# Altium PCB Top.PcbDoc
Units mm, origin at the board's own origin, x right, y up, seen from the top; angles counter-clockwise.
Board outline 184.78 x 90.88 mm, 2 copper layers (Top Layer, Bottom Layer); 66 components, 68 nets, 278 pads, 149 vias.
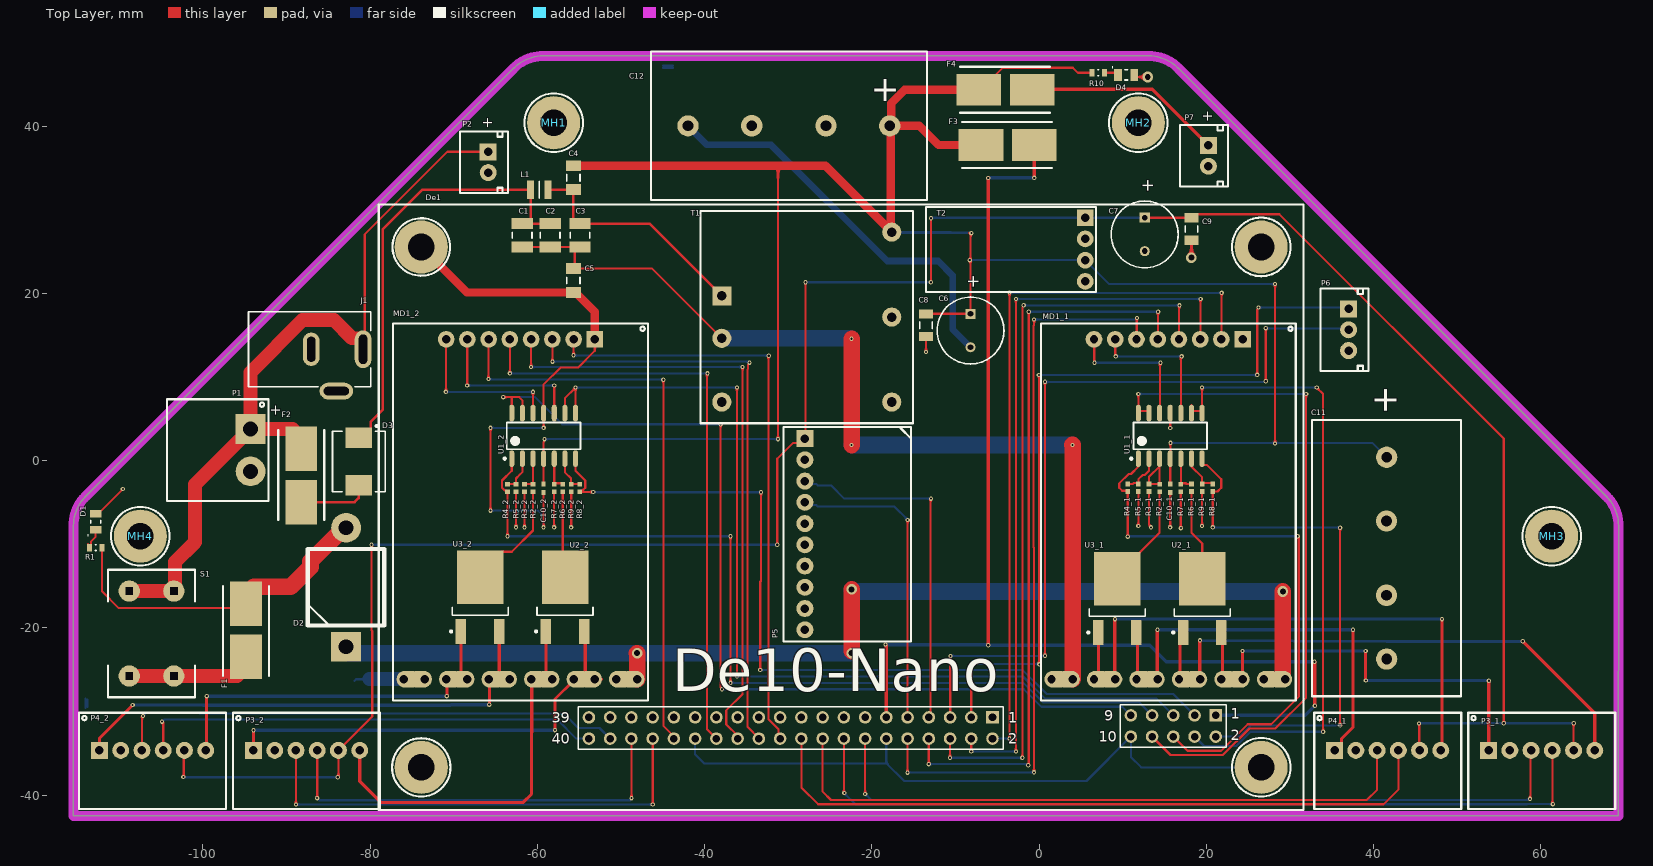
[diagram p0: Top Layer view]
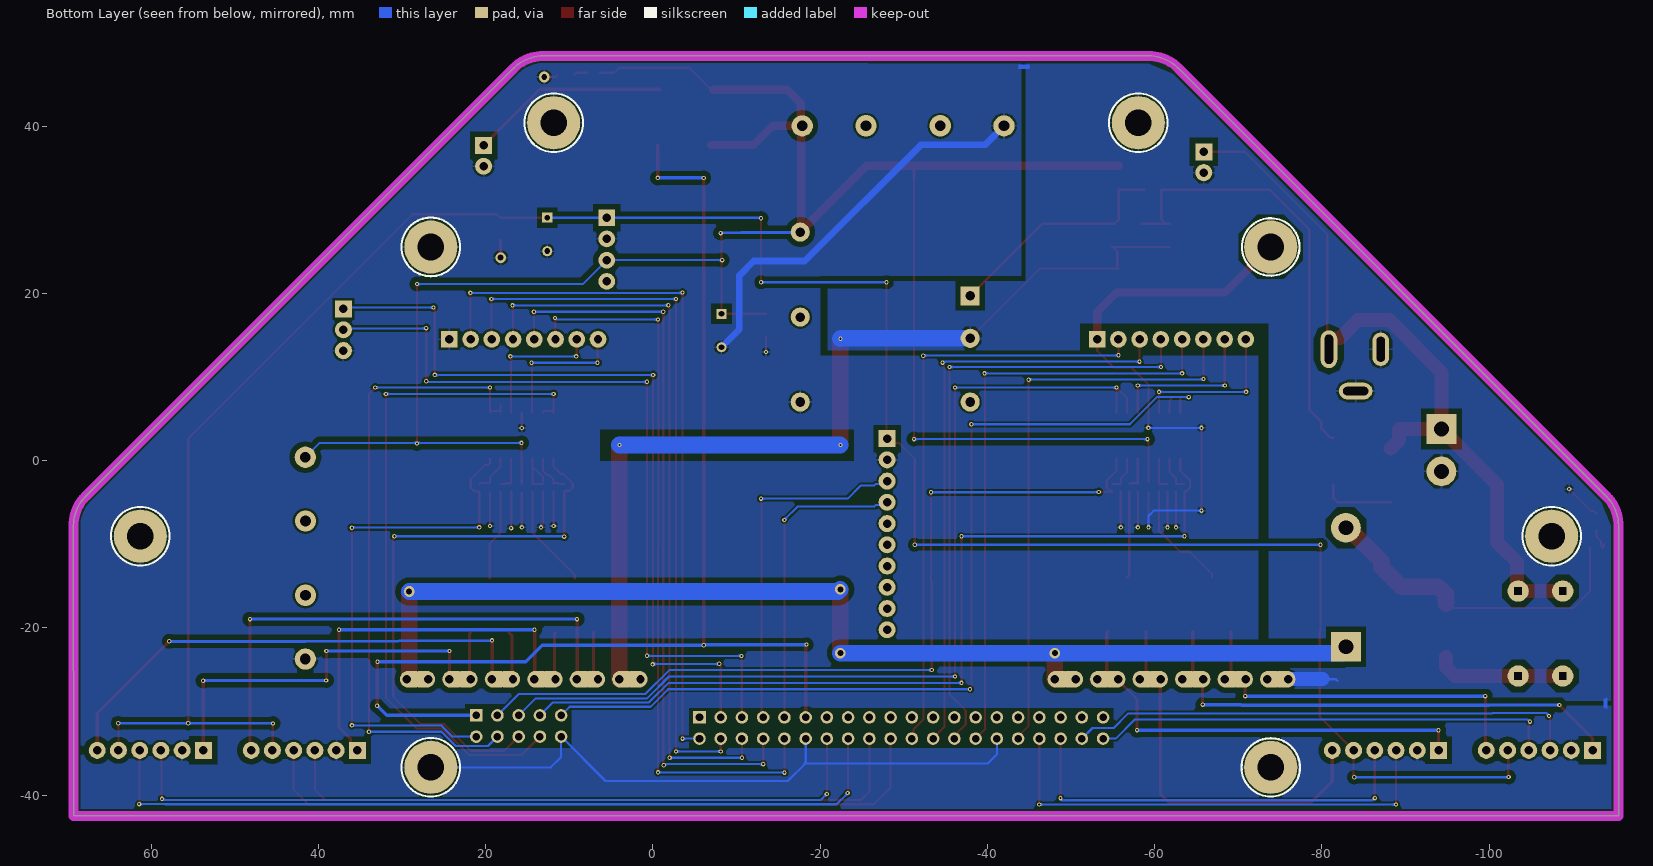
[diagram p1: Bottom Layer view, seen from below]

## Layer stack, top to bottom
Top Solder: solder mask 0.0102, Solder Resist, Dk 3.5
Top Layer: signal copper 0.0356
Dielectric 1: dielectric 0.32, FR-4, Dk 4.8
Bottom Layer: signal copper 0.0356
Bottom Solder: solder mask 0.0102, Solder Resist, Dk 3.5

## Board outline
-115.487,-42.48 -115.487,-7.789 cw(c-110.487,-7.789) -114.023,-4.253 -62.832,46.937 cw(c-59.297,43.402) -59.297,48.402 13.098,48.402 cw(c13.098,43.402) 16.633,46.937 67.824,-4.253 cw(c64.288,-7.789) 69.288,-7.789 69.287,-7.789 69.255,-42.48

## Design rules (kind name [scope] priority, off if disabled: settings)
Clearance "Schematic Clearance Constraint_5" [InNet('NetD3_1')] p1: gap=0.65 ignorepadtopadclearanceinfootprint=TRUE except(0: Arc-Hole Track-Hole SMDPad-Hole THPad-Hole Via-Hole Fill-Hole Poly-Hole Region-Hole Text-Hole)
Clearance "Schematic Clearance Constraint_2" [InNet('NetT1_6')] p2: gap=0.65 ignorepadtopadclearanceinfootprint=TRUE except(0: Arc-Hole Track-Hole SMDPad-Hole THPad-Hole Via-Hole Fill-Hole Poly-Hole Region-Hole Text-Hole)
Clearance "Schematic Clearance Constraint_4" [InNet('NetC3_1')] p3: gap=0.65 ignorepadtopadclearanceinfootprint=TRUE except(0: Arc-Hole Track-Hole SMDPad-Hole THPad-Hole Via-Hole Fill-Hole Poly-Hole Region-Hole Text-Hole)
Clearance "Schematic Clearance Constraint_7" [InNetClass('motor_out')] p4: gap=0.65 ignorepadtopadclearanceinfootprint=TRUE except(0: Arc-Hole Track-Hole SMDPad-Hole THPad-Hole Via-Hole Fill-Hole Poly-Hole Region-Hole Text-Hole)
Clearance "Schematic Clearance Constraint_3" [InNetClass('De10_power')] p5: gap=0.61 ignorepadtopadclearanceinfootprint=TRUE except(0: Arc-Hole Track-Hole SMDPad-Hole THPad-Hole Via-Hole Fill-Hole Poly-Hole Region-Hole Text-Hole)
Clearance "Schematic Clearance Constraint_18" [InNetClass('battery_power')] p6: gap=0.65 ignorepadtopadclearanceinfootprint=TRUE except(0: Arc-Hole Track-Hole SMDPad-Hole THPad-Hole Via-Hole Fill-Hole Poly-Hole Region-Hole Text-Hole)
Clearance "Schematic Clearance Constraint_13" [InNet('NetC1_1')] p7: gap=0.65 ignorepadtopadclearanceinfootprint=TRUE except(0: Arc-Hole Track-Hole SMDPad-Hole THPad-Hole Via-Hole Fill-Hole Poly-Hole Region-Hole Text-Hole)
Clearance "Schematic Clearance Constraint_1" [InNetClass('digital_5v')] p8: gap=0.61 ignorepadtopadclearanceinfootprint=TRUE except(0: Arc-Hole Track-Hole SMDPad-Hole THPad-Hole Via-Hole Fill-Hole Poly-Hole Region-Hole Text-Hole)
Clearance "Schematic Clearance Constraint" [InNet('3P3')] p9: gap=0.6 ignorepadtopadclearanceinfootprint=TRUE except(0: Arc-Hole Track-Hole SMDPad-Hole THPad-Hole Via-Hole Fill-Hole Poly-Hole Region-Hole Text-Hole)
Clearance [All] p10: gap=0.254 ignorepadtopadclearanceinfootprint=TRUE except(0: Arc-Hole Track-Hole SMDPad-Hole THPad-Hole Via-Hole Fill-Hole Poly-Hole Region-Hole Text-Hole)
ComponentClearance [All] p1 off: gap=0.254 collisioncheckmode=3 verticalgap=0.254 showdistances=FALSE
HoleSize [All] p1: absolutevalues=TRUE maxlimit=7.62 minlimit=0.025 maxpercent=80.000 minpercent=20.000
MinimumSolderMaskSliver [All] p1: minsoldermaskwidth=0.127
PolygonConnect [All] p1: connectstyle=Relief reliefconductorwidth=0.254 reliefentries=4 polygonreliefangle="90 Angle" airgapwidth=0.254
RoutingVias "Schematic Routing Via Style_5" [InNetClass('motor_out')] p1: holewidth=0.254 width=0.508 viastyle="Through Hole" minholewidth=0.254 minwidth=0.508 maxholewidth=0.381 maxwidth=0.762
RoutingVias "Schematic Routing Via Style_4" [InNetClass('De10_power')] p2: holewidth=0.254 width=0.508 viastyle="Through Hole" minholewidth=0.254 minwidth=0.508 maxholewidth=0.711 maxwidth=1.27
RoutingVias "Schematic Routing Via Style_3" [InNetClass('digital_5v')] p3: holewidth=0.711 width=1.27 viastyle="Through Hole" minholewidth=0.254 minwidth=0.508 maxholewidth=0.711 maxwidth=1.27
RoutingVias "Schematic Routing Via Style_2" [InNetClass('digital_power_in')] p4: holewidth=0.254 width=0.508 viastyle="Through Hole" minholewidth=0.254 minwidth=0.508 maxholewidth=0.381 maxwidth=0.762
RoutingVias "Schematic Routing Via Style_1" [InNetClass('digital_3P3v')] p5: holewidth=0.254 width=0.508 viastyle="Through Hole" minholewidth=0.254 minwidth=0.508 maxholewidth=0.711 maxwidth=1.27
RoutingVias "Schematic Routing Via Style" [InNetClass('battery_power')] p6: holewidth=0.9 width=1.67 viastyle="Through Hole" minholewidth=0.711 minwidth=1.27 maxholewidth=1.5 maxwidth=2.09
RoutingVias [All] p7: holewidth=0.381 width=0.635 viastyle="Through Hole" minholewidth=0.254 minwidth=0.508 maxholewidth=0.635 maxwidth=1.27
SilkToSilkClearance [All] p1: silktosilkclearance=0.051
SilkToSolderMaskClearance [IsPad] p1: minsilkscreentomaskgap=0.127 clearancetoexposedcopper=TRUE
SolderMaskExpansion [All] p1: expansion=0.102 istentingtop=FALSE
Width "Schematic Width Constraint_8" [InNetClass('motor_out')] p1: maxlimit=0.381 minlimit=0.254 preferedwidth=0.381
Width "Schematic Width Constraint_25" [InNetClass('De10_power')] p2: maxlimit=0.45 minlimit=0.41 preferedwidth=0.41
Width "Schematic Width Constraint_24" [InNetClass('battery_power')] p3: maxlimit=2 minlimit=0.254 preferedwidth=1.67
Width "Schematic Width Constraint_6" [InNet('3P3')] p4: maxlimit=0.381 minlimit=0.254 preferedwidth=0.254
Width "Schematic Width Constraint_5" [InNetClass('digital_power_in')] p5: maxlimit=0.31 minlimit=0.254 preferedwidth=0.29
Width "Schematic Width Constraint" [InNetClass('digital_5v')] p6: maxlimit=1 minlimit=0.254 preferedwidth=0.8
Width [All] p7: maxlimit=0.254 minlimit=0.254 preferedwidth=0.254
25 further rules are at their usual default settings.

## Classes and differential pairs
net class digital_power_in: NetC1_1 NetC3_1 NetD3_1 NetT1_6
net class De10_power: De10-Power NetF4_2
net class motor_out: MA1_1 MA1_2 MA2_1 MA2_2 MB1_1 MB1_2 MB2_1 MB2_2 NetT1_6
net class digital_5v: 5V NetT1_4
net class digital_3P3v: 3P3
net class battery_power: A_12V B_12V NetD1_1 NetD2_1 NetF1_1
net class MB_V[1..2]: MB_V1 MB_V2
net class MB_PWM[1..2]: MB_PWM1 MB_PWM2
net class MB_phaseB[1..2]: MB_phaseB1 MB_phaseB2
net class MB_phaseA[1..2]: MB_phaseA1 MB_phaseA2
net class MB_DIR[1..2]: MB_DIR1 MB_DIR2
net class MA_V[1..2]: MA_V1 MA_V2
net class MA_PWM[1..2]: MA_PWM1 MA_PWM2
net class MA_phaseB[1..2]: MA_phaseB1 MA_phaseB2
net class MA_phaseA[1..2]: MA_phaseA1 MA_phaseA2
net class MA_DIR[1..2]: MA_DIR1 MA_DIR2
net class Drive_EN[1..2]: Drive_EN1 Drive_EN2
net class CSB_FeedBack[1..2]: CSB_FeedBack1 CSB_FeedBack2
net class CSA_FeedBack[1..2]: CSA_FeedBack1 CSA_FeedBack2
component class Power: C1 C2 C3 C4 C5 C6 C7 C8 C9 D1 D2 D3 F1 F2 J1 L1 LED1 P1 P2 R1 S1 T1 T2
component class Communication: C11 C12 D4 De1 F3 F4 P5 P6 P7 R10
channel class MotorCtrl: MotorCtrl1 MotorCtrl2
component class Top: MH1 MH2 MH3 MH4
component class MotorCtrl2: C10_2 MD1_2 P3_2 P4_2 R2_2 R3_2 R4_2 R5_2 R6_2 R7_2 R8_2 R9_2 U1_2 U2_2 U3_2
component class MotorCtrl1: C10_1 MD1_1 P3_1 P4_1 R2_1 R3_1 R4_1 R5_1 R6_1 R7_1 R8_1 R9_1 U1_1 U2_1 U3_1

## Components (designator, comment, footprint, x,y, rotation, side; value= is the part's Value field where it differs from the comment)
C1 "25V 3.3uF" "1210 SMD" -61.824,26.947 r270 top value=3.3uF
C2 "25V 3.3uF" "1210 SMD" -58.471,26.947 r270 top value=3.3uF
C3 "25V 3.3uF" "1210 SMD" -54.915,26.947 r270 top value=3.3uF
C4 "2kV 1800pF" "1206 SMD" -55.71,33.836 r90 top value=1800pF
C5 "2kV 1800pF" "1206 SMD" -55.71,21.537 r270 top value=1800pF
C6 "25V 220uF" RB4-8 -8.204,13.559 r90 top value=1000uF
C7 "25V 220uF" RB4-8 12.624,25.053 r90 top value=1000uF
C8 "50V 0.1uF" C1206 -13.538,16.179 r90 top value=1uF
C9 "50V 0.1uF" C1206 18.212,27.703 r90 top value=1uF
C10_1 "0402 SMD MLCC" 0402 15.672,-3.313 r270 top value=0.1uF (schematic designator C10)
C10_2 "0402 SMD MLCC" 0402 -59.258,-3.313 r270 top value=0.1uF (schematic designator C10)
C11 "5.5v 10f" "5.5V 10F SUPPY CAP" 49.794,-11.658 r270 top
C12 "5.5v 10f" "5.5V 10F SUPPY CAP" -29.929,31.791 r180 top
D1 "0805 LED(G)" "0805 SMD DIODE" -112.825,-7.3 r90 top
D2 "10SQ045" 10SQ045 -87.452,-19.715 r90 top
D3 "SK54" SK54 -81.356,-0.101 r270 top
D4 "0805 LED(G)" "0805 SMD DIODE" 10.404,46.127 r0 top
De1 "De10-Nano" DE10-NANO -53.839,-35.787 r0 top locked
F1 "Fuse Holder" "SMD FUSES HOLDER" -94.844,-20.167 r90 top value="220V 10A"
F2 "Fuse Holder" "SMD FUSES HOLDER" -88.24,-1.879 r270 top value="220V 5A"
F3 "Fuse Holder" "SMD FUSES HOLDER" -3.658,37.745 r0 top value="220V 2.5A"
F4 "Fuse Holder" "SMD FUSES HOLDER" -3.912,44.349 r0 top value="220V 2.5A"
J1 "PWR2.5" PWD2.5 -88.953,12.417 r0 top
L1 "1uH" DFE2HCAH1R0MJ0L -59.783,32.411 r0 top value=2.2uH
MD1_1 "MD02" MOTOR_DRIVER 24.335,14.503 r270 top locked (schematic designator MD1)
MD1_2 "MD02" MOTOR_DRIVER -53.135,14.503 r270 top locked (schematic designator MD1)
MH1 "M3 Hole" "M3 HOLE" -58.054,40.402 r0 top locked
MH2 "M3 Hole" "M3 HOLE" 11.855,40.402 r0 top locked
MH3 "M3 Hole" "M3 HOLE" 61.288,-9.031 r0 top locked
MH4 "M3 Hole" "M3 HOLE" -107.487,-9.031 r0 top locked
P1 "battery_pin" "KF2EDGR-5.08 2P" -94.31,3.797 r270 top
P2 "battery_display" B2B-XH-A -63.526,39.37 r270 top
P3_1 "MA_Pin" S6B-XH-A 51.307,-30.149 r0 top locked (schematic designator P3)
P3_2 "MA_Pin" S6B-XH-A -96.394,-30.149 r0 top (schematic designator P3)
P4_1 "MB_Pin" S6B-XH-A 32.892,-30.149 r0 top (schematic designator P4)
P4_2 "MB_Pin" S6B-XH-A -114.809,-30.149 r0 top (schematic designator P4)
P5 "MPU9250" MPU9250 -28.016,2.637 r0 top
P6 "UART_Pin" B3B-XH-A 39.362,10.719 r270 top
P7 "RPi Power" B2B-XH-A 22.598,40.132 r270 top
R1 "0603" "0603 SMD RES" -112.825,-10.389 r0 top value=150K
R2_1 "12k" "0402 SMD RES" 14.402,-3.263 r90 top (schematic designator R2)
R2_2 "12k" "0402 SMD RES" -60.528,-3.263 r90 top (schematic designator R2)
R3_1 "3.3k" "0402 SMD RES" 13.132,-3.246 r270 top (schematic designator R3)
R3_2 "3.3k" "0402 SMD RES" -61.544,-3.263 r270 top (schematic designator R3)
R4_1 "3.3k" "0402 SMD RES" 10.592,-3.246 r270 top (schematic designator R4)
R4_2 "3.3k" "0402 SMD RES" -63.576,-3.263 r270 top (schematic designator R4)
R5_1 "12k" "0402 SMD RES" 11.862,-3.246 r90 top (schematic designator R5)
R5_2 "12k" "0402 SMD RES" -62.56,-3.263 r90 top (schematic designator R5)
R6_1 "12k" "0402 SMD RES" 18.212,-3.246 r90 top (schematic designator R6)
R6_2 "12k" "0402 SMD RES" -56.972,-3.263 r90 top (schematic designator R6)
R7_1 "3.3k" "0402 SMD RES" 16.942,-3.263 r270 top (schematic designator R7)
R7_2 "3.3k" "0402 SMD RES" -57.988,-3.263 r270 top (schematic designator R7)
R8_1 "3.3k" "0402 SMD RES" 20.752,-3.246 r270 top (schematic designator R8)
R8_2 "3.3k" "0402 SMD RES" -54.94,-3.263 r270 top (schematic designator R8)
R9_1 "12k" "0402 SMD RES" 19.482,-3.246 r90 top (schematic designator R9)
R9_2 "12k" "0402 SMD RES" -55.956,-3.263 r90 top (schematic designator R9)
R10 "0603" "0603 SMD RES" 7.073,46.381 r180 top value=150K
S1 "EMS" 4.8插片 -108.814,-15.595 r270 top
T1 "JSM2512S05" JSM2524S05 -15.088,29.871 r270 top
T2 "Small Power Supply" "SAMLL POWER SUPPLY" 6.782,30.323 r270 top
U1_1 "OPA4277UA" OPA4277UA 15.672,2.96 r90 top (schematic designator U1)
U1_2 "OPA4277UA" OPA4277UA -59.258,2.96 r90 top (schematic designator U1)
U2_1 "MBRD1035CTL" MBRD1035CTL 19.505,-16.449 r90 top (schematic designator U2)
U2_2 "MBRD1035CTL" MBRD1035CTL -56.695,-16.322 r90 top (schematic designator U2)
U3_1 "MBRD1035CTL" MBRD1035CTL 9.345,-16.449 r90 top (schematic designator U3)
U3_2 "MBRD1035CTL" MBRD1035CTL -66.855,-16.322 r90 top (schematic designator U3)

## Footprints (in the part's own frame and the unit in brackets; to place one, negate y for a bottom-side part, rotate by r counter-clockwise, add the part's x,y. Pads: shape width x height; smd on the part's side, far side on the other; paste and mask are expansions set on the pad)
4.8插片 [mil]
  round 100 hole 35 square: 1(0,210) 1(0,0) 2(400,210) 2(400,0)
  silkscreen extent -100,-100 500,310
"5.5V 10F SUPPY CAP" [mm]
  round 2.54 hole 1.27: 1(-12.065,-8.24) 2(12.065,-8.24)
  silkscreen extent -16.51,-17.15 16.51,0.64
10SQ045 [mil] "45V 10A Schottky Diode"
  round 140 hole 70: 1(460,-180)
  rect 140x140 hole 70: 2(-100,-180)
  silkscreen extent 0,-360 360,0
0402 [mm] "Chip Capacitor, Body 1.0x0.5mm, IPC High Density"
  rect 0.6x0.5 smd: 1(-0.5,0) 2(0.5,0)
  body extent -0.55,-0.3 0.55,0.3, height 1.3
"0402 SMD RES" [mm] "Chip Resistor, 2-Leads, Body 1.00x0.50mm, IPC Medium Density"
  rect 0.55x0.55 smd: 1(-0.45,0) 2(0.45,0)
  body extent -0.53,-0.28 0.53,0.28, height 0.37
"0603 SMD RES" [mm] "Chip Resistor, 2-Leads, Body 1.58x0.85mm, IPC Medium Density"
  rect 0.6x0.9 smd: 1(-0.75,0) 2(0.75,0)
  silkscreen extent -0.05,-0.35 0.05,0.35, body extent -0.83,-0.43 0.82,0.43, height 0.5
"0805 SMD DIODE" [mm] "Chip Diode, 2-Leads, Body 2.00x1.25mm, IPC Medium Density"
  rect 0.9x1.4 smd: 1(-0.975,0) 2(0.975,0)
  silkscreen extent -1.69,-0.6 0.15,0.96, body extent -1,-0.63 1,0.63, height 1
"1206 SMD" [mm]
  rect 1.3x1.8 smd: 1(-1.425,0) 2(1.425,0)
  silkscreen extent -0.4,-0.8 0.4,0.8, body extent -1.68,-0.87 1.67,0.87, height 1.35
"1210 SMD" [mm]
  rect 1.3x2.55 smd: 1(-1.4,0) 2(1.4,0)
  silkscreen extent -0.35,-1.17 0.35,1.18, body extent -1.7,-1.25 1.7,1.25, height 1.4
B2B-XH-A [mil] "XH Header-top 2P"
  rect 80x80 hole 40: 1(96,-93)
  round 80 hole 40: 2(194,-93)
  silkscreen extent 0,-226 290,0
B3B-XH-A [mil] "XH Header-top 3P"
  rect 80x80 hole 40: 1(-292,-93)
  round 80 hole 40: 2(-194,-93) 3(-96,-93)
  silkscreen extent -388,-226 0,0
C1206 [mm] "Chip Capacitor, Body 3.2x1.6mm, IPC High Density"
  rect 1.1x1.7 smd: 1(-1.35,0) 2(1.35,0)
  silkscreen extent -0.4,-0.75 0.4,0.75, body extent -1.7,-0.9 1.7,0.9, height 1.3
DE10-NANO [mm]
  round 6.35 hole 3.2: 0(-20.05,-0.89) 0(-20.05,61.34) 0(80.39,-0.89) 0(80.39,61.34)
  rect 1.5x1.5 hole 0.9: 1(74.96,5.33) 11(48.26,5.08)
  round 1.5 hole 0.9: 2(74.96,2.79) 3(72.42,5.33) 4(72.42,2.79) 5(69.88,5.33) 6(69.88,2.79) 7(67.34,5.33) 8(67.34,2.79) 9(64.8,5.33) 10(64.8,2.79) 12(48.26,2.54) 13(45.72,5.08) 14(45.72,2.54) 15(43.18,5.08) 16(43.18,2.54) 17(40.64,5.08) 18(40.64,2.54) 19(38.1,5.08) 20(38.1,2.54) 21(35.56,5.08) 22(35.56,2.54) 23(33.02,5.08) 24(33.02,2.54) 25(30.48,5.08) 26(30.48,2.54) 27(27.94,5.08) 28(27.94,2.54) 29(25.4,5.08) 30(25.4,2.54) 31(22.86,5.08) 32(22.86,2.54) 33(20.32,5.08) 34(20.32,2.54) 35(17.78,5.08) 36(17.78,2.54) 37(15.24,5.08) 38(15.24,2.54) 39(12.7,5.08) 40(12.7,2.54) 41(10.16,5.08) 42(10.16,2.54) 43(7.62,5.08) 44(7.62,2.54) 45(5.08,5.08) 46(5.08,2.54) 47(2.54,5.08) 48(2.54,2.54) 49(0,5.08) 50(0,2.54)
  silkscreen extent -25.13,-5.97 85.47,66.42
DFE2HCAH1R0MJ0L [mm]
  rect 0.85x2.2 smd: 1(-1.025,0) 2(1.025,0)
  silkscreen extent 0,-1 0,1, body extent -1.25,-1 1.25,1, height 1.2
JSM2524S05 [mil]
  rect 90x90 hole 45: 1(400,-900)
  round 90 hole 45: 2(600,-900) 3(100,-100) 4(500,-100) 5(900,-100) 6(900,-900)
  silkscreen extent 0,-1000 1000,0
"KF2EDGR-5.08 2P" [mil]
  rect 140x140 hole 70: 1(0,0)
  round 140 hole 70: 2(200,0)
  silkscreen extent -139,-394 339,85
"M3 HOLE" [mm] "M3 Hole"
  round 6.35 hole 3.2: 1(0,0)
  silkscreen extent -3.5,-3.5 3.5,3.5
MBRD1035CTL [mm] "D-PAK, 3-Pads, Body 6.21x6.73mm (max), IPC Medium Density"
  rect 3x1.25 smd: 1(-4.1,2.29) 3(-4.1,-2.29)
  rect 6.4x5.55 smd: 4(2.35,0)
  silkscreen extent -4.22,-3.35 -1.25,3.59, body extent -4.14,-3.37 5.76,3.37, height 2.51
MOTOR_DRIVER [mm] "17A 雙路 大功率馬達驅動模組"
  rect 2x2 hole 1: 1(0,0)
  round 2 hole 1: 2(0,-2.54) 3(0,-5.08) 4(0,-7.62) 5(0,-10.16) 6(0,-12.7) 7(0,-15.24) 8(0,-17.78)
  oval 2x2.8 hole 1 copper offset 0,0.55: 9(40.64,2.54) 10(40.64,-2.54) 11(40.64,-7.62) 12(40.64,-12.7) 13(40.64,-17.78) 14(40.64,-22.86)
  oval 2x2.8 hole 1 copper offset 0,-0.55: 9(40.64,5.08) 10(40.64,0) 11(40.64,-5.08) 12(40.64,-10.16) 13(40.64,-15.24) 14(40.64,-20.32)
  silkscreen extent -1.91,-24.13 43.18,6.35
MPU9250 [mil] "MPU9250"
  rect 80x80 hole 40: 1(0,0)
  round 80 hole 40: 2(0,-100) 3(0,-200) 4(0,-300) 5(0,-400) 6(0,-500) 7(0,-600) 8(0,-700) 9(0,-800) 10(0,-900)
  silkscreen extent -100,-955 500,55
OPA4277UA [mm] "SOIC, 14-Leads, Body 8.65x3.90mm, Pitch 1.27mm, IPC Medium Density"
  oval 2x0.6 smd: 1(-2.725,3.81) 2(-2.725,2.54) 3(-2.725,1.27) 4(-2.725,0) 5(-2.725,-1.27) 6(-2.725,-2.54) 7(-2.725,-3.81) 8(2.725,-3.81) 9(2.725,-2.54) 10(2.725,-1.27) 11(2.725,0) 12(2.725,1.27) 13(2.725,2.54) 14(2.725,3.81)
  silkscreen extent -2.85,-4.4 1.6,4.78, body extent -3,-4.4 3,4.4, height 1.75
PWD2.5 [mm]
  oval 2x4.5 hole 1 slot 3.5 at 90 deg: 1(8.105,0.905)
  oval 2x4 hole 1 slot 3 at 90 deg: 2(1.905,0.905)
  oval 4x2 hole 1 slot 3 at 0 deg: 3(4.905,-4.095)
  silkscreen extent -5.6,-3.6 9.01,5.41
RB4-8 [mm]
  rect 1.2x1.2 hole 0.7: 1(4,0)
  round 1.2 hole 0.7: 2(0,0)
  silkscreen extent -2,-4 6,4
S6B-XH-A [mil] "XH Header-side 6P"
  rect 80x80 hole 40: 1(96,-177)
  round 80 hole 40: 2(196,-177) 3(296,-177) 4(396,-177) 5(496,-177) 6(596,-177)
  silkscreen extent 0,-453 692,0
"SAMLL POWER SUPPLY" [mm] "5v to 3P3 Power Supply"
  rect 2x2 hole 1.02: 1(1.27,-1.27)
  round 2 hole 1.02: 2(3.81,-1.27) 3(6.35,-1.27) 4(8.89,-1.27)
  silkscreen extent 0,-20.32 10.16,0
SK54 [mm] "Molded Diode, 2-Leads, Body 6.86x5.91mm, IPC Medium Density"
  rect 2.45x3.15 smd: 1(2.85,0) 2(-2.85,0)
  silkscreen extent -4.37,-3.15 3.6,3.15, body extent -3.55,-3.11 3.56,3.11, height 2.62
"SMD FUSES HOLDER" [mil] "SMD 1808 Fuse Holder"
  rect 210x150 smd: 1(-130,0) 2(121,0)
  silkscreen extent -219,-108 205,108

## Part data
C1 C2 C3: library part Cap, "50V 3.3uF 1210 MLCC", LatestRevisionDate=17-Jul-2002, LatestRevisionNote="Re-released for DXP Platform.", PackageDescription="Radial Cap, Thru-Hole; 2 Leads; 0.3 in Pin Spacing", PackageReference=RAD-0.3, Published=8-Jun-2000, Publisher="Altium Limited"
C4 C5: library part Cap, "Capacitor", LatestRevisionDate=17-Jul-2002, LatestRevisionNote="Re-released for DXP Platform.", PackageDescription="Radial Cap, Thru-Hole; 2 Leads; 0.3 in Pin Spacing", PackageReference=RAD-0.3, Published=8-Jun-2000, Publisher="Altium Limited"
C6 C7: library part "Cap Pol1", "DIP cap", ComponentLink1Description=buy_link, ComponentLink1URL=https://shopee.tw/(%E5%85%83%E8%80%80)-%E7%9B%B4%E6%8F%92-%E9%9B%BB%E8%A7%A3%E9%9B%BB%E5%AE%B9-47uF~1000uF-16V~50V-%E9%AB%94%E7%A9%8D-8*14.5mm~10*19.5mm(5%E9%A1%86%E4%B8%80%E6%A8%99)-i.140576581.2524079905?sp_atk=ccd45567-e386-4bfb-a6e8-2480335a57a5, LatestRevisionDate=17-Jul-2002, LatestRevisionNote="Re-released for DXP Platform.", PackageDescription="Polarized Capacitor (Radial); 2 Leads", PackageReference=RB7.6-15, Published=8-Jun-2000, Publisher="Altium Limited"
C8 C9: library part "Cap Semi", "0805F105Z250CT", LatestRevisionDate=29-May-2009, LatestRevisionNote="IPC-7351 Footprint Added.", PackageDescription="Chip Capacitor", PackageReference=C1206, Published=8-Jun-2000, Publisher="Altium Limited"
C10_1 C10_2: library part "Cap Semi", "Capacitor (Semiconductor SIM Model)", LatestRevisionDate=29-May-2009, LatestRevisionNote="IPC-7351 Footprint Added.", PackageDescription="Chip Capacitor", PackageReference=C1206, Published=8-Jun-2000, Publisher="Altium Limited"
C11 C12: library part "Cap Pol1", "Super Capacitor", LatestRevisionDate=17-Jul-2002, LatestRevisionNote="Re-released for DXP Platform.", PackageDescription="Polarized Capacitor (Radial); 2 Leads", PackageReference=RB7.6-15, Published=8-Jun-2000, Publisher="Altium Limited"
D1 D4: library part LED0, "Typical INFRARED GaAs LED", LatestRevisionDate=08-Jul-2005, LatestRevisionNote="Mech Layer 1 removed.", PackageDescription="LED; 2 Leads", PackageReference=LED-0, Published=8-Jun-2000, Publisher="Altium Limited"
D2 D3: library part Diode, "Default Diode", Code_JEDEC=DO-214-AB, LatestRevisionDate=17-Jul-2002, LatestRevisionNote="Re-released for DXP Platform.", PackageDescription="DO-214-AB/SMC; 2 C-Bend Leads; Body 7.9 x 5.9 mm, inc. leads (LxW)", PackageReference=SMC, PackageVersion=Sep-1996, Published=8-Jun-2000, Publisher="Altium Limited"
F1: library part "Fuse 1", "0451010.MRL", LatestRevisionDate=17-Jul-2002, LatestRevisionNote="Re-released for DXP Platform.", PackageDescription="Thru-Hole; 2 Leads", PackageReference=PIN-W2/E2.8, Published=8-Jun-2000, Publisher="Altium Limited"
F2 F3 F4: library part "Fuse 1", "0451005.MRL", LatestRevisionDate=17-Jul-2002, LatestRevisionNote="Re-released for DXP Platform.", PackageDescription="Thru-Hole; 2 Leads", PackageReference=PIN-W2/E2.8, Published=8-Jun-2000, Publisher="Altium Limited"
J1: "Low Voltage Power Supply Connector", ComponentLink1Description="Manufacturer Link", ComponentLink1URL=http://domino.kycon.com/internet/Products.html, DatasheetDocument=09-May-2002, Published=17-Dec-2003, Publisher="Altium Limited"
L1: library part Inductor, "1uH 3A 1008 SMD lnductor", Code_IEC=1005, Code_JEITA=0402, LatestRevisionDate=29-May-2009, LatestRevisionNote="IPC-7351 Footprint Added.", PackageDescription="Chip Inductor", PackageReference=0402-A, Published=8-Jun-2000, Publisher="Altium Limited"
MD1_1 MD1_2: library part "Motor Driver", "17A 2 Cheel Motor Driver", buy_link=https://www.ruten.com.tw/item/show?21811773783671
MH1 MH2 MH3 MH4: library part M3_Hole
P1: library part "Header 2", "KF2EDGR-5.08 2P", LatestRevisionDate=17-Jul-2002, LatestRevisionNote="Re-released for DXP Platform.", Publisher="Altium Limited"
P2 P7: library part "Header 2", "B2B-XH-A", LatestRevisionDate=17-Jul-2002, LatestRevisionNote="Re-released for DXP Platform.", Publisher="Altium Limited"
P3_1 P3_2 P4_1 P4_2: library part "Header 6", "S6B-XH-A", LatestRevisionDate=17-Jul-2002, LatestRevisionNote="Re-released for DXP Platform.", Publisher="Altium Limited"
P5: library part "IMU Pin", "3 axis Gyro, Acceleration, Magmetic"
P6: library part "Header 3", "B3B-XH-A", LatestRevisionDate=17-Jul-2002, LatestRevisionNote="Re-released for DXP Platform.", Publisher="Altium Limited"
R1 R2_1 R2_2 R3_1 R3_2 R4_1 R4_2 R5_1 R5_2 R6_1 R6_2 R7_1 R7_2 R8_1 R8_2 R9_1 R9_2 R10: library part Res1, "Resistor", LatestRevisionDate=17-Jul-2002, LatestRevisionNote="Re-released for DXP Platform.", PackageDescription="Axial Device, Thru-Hole; 2 Leads; 0.3 in Pin Spacing", PackageReference=AXIAL-0.3, Published=8-Jun-2000, Publisher="Altium Limited"
S1: library part SW-SPST, LatestRevisionDate=17-Jul-2002, LatestRevisionNote="Re-released for DXP Platform.", PackageDescription="Switch; 2 Leads", PackageReference=SPST-2, Published=24-Mar-1999, Publisher="Altium Limited"
T1: library part JSM2524S05, "JSM2524S05 Isolation DC-DC converter"
T2: library part "PowerSupply 3P", BuyLink=https://www.ruten.com.tw/item/show?21817939184609
U1_1 U1_2: library part "Small Signal Amplifier", "Small Signal Amplifier", buy_link=https://www.ruten.com.tw/item/show?22015419000992, datasheet=https://datasheet.ciiva.com/27050/905643-27050822.pdf?src-supplier=Jameco
U2_1 U2_2 U3_1 U3_2: library part "Diode IC", "35V 10A 2 Cheel Diode", buy_link=https://www.ruten.com.tw/item/show?21744290003226, datasheet=https://datasheet.ciiva.com/905/mbrd1035ctl-d-905952.pdf?src-supplier=Digi-Key

## Via types
v1: diameter 0.508, hole 0.254, Top Layer to Bottom Layer, 139 vias
v2: diameter 1.27, hole 0.711, Top Layer to Bottom Layer, 6 vias
v3: diameter 2.54/2.54 (per signal layer), hole 1.27, Top Layer to Bottom Layer, 4 vias

## Nets (pads, with @x,y where several pads share a name; then routed paths per layer and width w, separated by ;. In a path a pad name is that pad's centre, name@x,y a point inside that pad or via, vN(x,y) a via of type N, cw(c..) or ccw(c..) an arc to the next point about the centre after c; other vN are vias at no path point)
3P3: C7.1 C9.2 P3_1.5 P3_2.5 P4_1.5 P4_2.5 P5.1 T2.1 | length 294.7
  Top Layer w0.254: v1(-102.344,-37.819) -102.295,-37.77 -102.295,-34.73 P4_2.5 ; v1(-83.885,-37.861) -83.885,-37.792 -83.795,-37.702 P3_2.5 -79.747,-30.597 -79.747,-20.407 -79.832,-20.322 v1(-79.832,-10.063) ; v1(-31.318,-10.063) -31.318,0.224 -29.413,2.129 -28.524,2.129 -27.922,2.731 -27.94,2.749 v1(-27.94,21.336) ; v1(-12.954,21.336) -12.936,21.354 v1(-12.936,28.983) ; C7.1 C9.2 18.624,29.465 28.731,29.465 55.55,2.646 v1(55.55,-31.399) ; v1(45.417,-31.426) 45.454,-31.463 45.454,-34.608 P4_1.5 ; P3_1.5 63.906,-31.426 v1(63.932,-31.399)
  Bottom Layer w0.254: v1(-102.344,-37.819) -102.302,-37.861 v1(-83.885,-37.861) ; v1(-79.832,-10.063) v1(-31.318,-10.063) ; v1(-27.94,21.336) v1(-12.954,21.336) ; v1(-12.936,28.983) -12.866,29.053 T2.1 C7.1 ; v1@45.39,-31.4 v1(45.417,-31.426) ; v1@45.39,-31.399 v1(55.55,-31.399) v1(63.932,-31.399)
5V: C4.2 C6.1 C8.2 C10_1.1 C10_2.1 C11.1 C12.1 F3.1 F4.1 R10.2 T1.3 T2.3 U1_1.4 U1_2.4 | length 280.7
  Top Layer w0.254: C10_2.1@-59.258,-2.518 U1_2.4 -59.258,2.22 -59.212,2.265 -59.212,2.519 v1(-59.164,2.567) ; v1(-31.224,2.567) -31.224,35.261 ; C8.2 -13.508,17.559 C6.1 -8.204,27.045 -8.364,27.205 v1(-8.11,27.205) ; F4.1 -6.998,44.349 -4.356,46.991 4.014,46.991 4.624,46.381 R10.2 ; C10_1.1 U1_1.4 ; U1_1.4@15.683,0.235 15.683,2.118 v1(15.694,2.129) ; v1(28.212,2.059) v1(28.212,21.109)
  Top Layer w1: C4.2 -31.224,35.261 -25.558,35.261 T1.3@-17.746,27.449 ; C12.1@-17.746,39.913 T1.3@-17.746,27.449 ; F4.1 -16.104,44.349 -17.676,42.777 -17.676,40.219 C12.1 -14.326,40.031 -12.04,37.745 F3.1 ; T1.3@-17.746,27.449 T1.3 T1.3@-17.746,27.449
  Bottom Layer w0.254: v1(-59.164,2.567) v1(-31.224,2.567) ; -10.49,27.275 -10.545,27.331 T1.3 -17.551,27.254 -10.545,27.254 -8.158,27.254 v1(-8.11,27.205) ; v1(-8.294,23.973) T2.3 8.376,21.109 v1(28.212,21.109) ; v1(15.694,2.129) 39.832,2.129 C11.1
A_12V: D2.2 MD1_1.9 MD1_2.9 | length 133.6
  Top Layer w2: v2(-48.082,-23.017) -48.055,-23.043 MD1_2.9@-48.055,-26.137 ; v2@-22.428,-22.752 v2(-22.428,-15.397) ; MD1_1.9@29.134,-25.857 v2(29.134,-15.651)
  Bottom Layer w2: D2.2 -83.134,-22.509 -82.626,-23.017 v2(-48.082,-23.017) v2(-22.428,-23.017) ; v2(-22.428,-15.397) -22.174,-15.651 v2(29.134,-15.651)
A_GND: C1.2 C2.2 C3.2 C5.1 C5.2 C6.2 C7.2 C8.1 C9.1 C10_1.2 C10_2.2 C11.2 C12.2 D1.2 D4.2 De1.0 De1.10 De1.22 De1.40 J1.2 J1.3 MD1_1.1 MD1_1.14 MD1_2.1 MD1_2.14 MH1.1 MH2.1 MH3.1 MH4.1 P1.2 P2.2 P3_1.2 P3_2.2 P4_1.2 P4_2.2 P5.2 P6.3 P7.2 R3_1.2 R3_2.2 R5_1.1 R5_2.1 R7_1.2 R7_2.2 R9_1.1 R9_2.1 T1.2 T1.5 T2.2 U1_1.11 U1_2.11 | length 371.7
  Top Layer w0.254: D1.2 -112.502,-6.002 -112.175,-6.002 v1(-109.576,-3.403) ; v1(-65.608,-5.982) v1(-65.608,3.924) ; v1(-62.568,-7.975) -62.56,-7.966 R5_2.1 R5_2.1@-62.448,-3.825 ; C1.2 C2.2 -58.467,25.551 -54.919,25.551 C3.2 -55.013,25.547 -55.536,25.024 C5.1@-55.536,22.962 ; v1(-61.552,-7.975) -61.544,-7.966 R3_2.2 ; v1(-59.266,-7.975) -59.258,-7.966 C10_2.2 ; v1(-59.258,3.924) U1_2.11 -59.258,9.118 -57.23,11.146 -55.111,11.146 -53.135,13.122 MD1_2.1 ; v1(-57.996,-7.975) R7_2.2@-57.996,-3.825 ; R7_2.2 -57.996,-3.722 R7_2.2@-57.996,-3.825 ; R7_2.2@-57.984,-3.825 R7_2.2@-57.996,-3.825 ; v1(-55.964,-7.975) -55.956,-7.966 R9_2.1 ; C5.1 -46.279,22.962 T1.2 ; v1(-13.538,12.987) C8.1 ; D4.2 11.633,45.873 v2(12.985,45.873) ; v1(11.862,-7.818) R5_1.1 ; R3_1.2 13.132,-7.661 13.378,-7.906 v1(13.378,-7.975) ; v1(15.664,-7.975) 15.672,-7.966 C10_1.2 ; v1(15.672,3.907) U1_1.11 ; v1@16.934,-7.975 v1@16.938,-7.971 ; v1@16.934,-7.934 R7_1.2@16.934,-3.722 ; R7_1.2@16.938,-3.825 R7_1.2@16.938,-3.717 ; v1(19.482,-7.818) R9_1.1@19.482,-3.771
  Top Layer w0.381: v2(18.206,24.267) 18.212,24.273 C9.1
  Top Layer w1: De1.0@-73.889,25.553 -68.448,20.112 -55.46,20.112 -53.135,17.787 MD1_2.1
  Top Layer w2: v1(-22.428,1.875) v1(-22.428,14.575) ; v1(3.988,1.875) 4.015,1.849 MD1_1.14@4.015,-26.137
  Bottom Layer w0.254: -114.046,-29.591 -114.046,-28.448 ; -113.792,-29.464 -113.792,-28.575 ; -81.864,-26.319 -81.682,-26.137 -80.086,-26.137 ; v1(-65.608,-5.982) -59.893,-5.982 -59.893,-5.991 -59.266,-6.617 v1(-59.266,-7.975) ; v1(-65.608,3.924) v1(-59.258,3.924) ; -44.958,46.99 -43.815,46.99 ; -44.958,47.244 -43.815,47.244 ; De1.40 -41.139,-35.149 -40.081,-36.208 -18.314,-36.208 -18.279,-36.173 ; De1.22 -18.279,-36.173 ; De1.0@26.551,-36.677 12.205,-36.677 10.961,-35.433 De1.10 5.656,-38.302 -16.15,-38.302 -18.279,-36.173
  Bottom Layer w0.8: C12.2 -39.729,37.766 -32.051,37.766 -18.161,23.876 -12.065,23.876 -10.351,22.162 -10.351,15.707 C6.2
  Bottom Layer w1.67: -80.086,-26.137 MD1_2.14@-75.995,-26.137
  Bottom Layer w2: T1.2 -22.483,14.631 v1(-22.428,14.575) ; v1(-22.428,1.875) v1(3.988,1.875)
  other v1: 16.942,-8.072
B_12V: F2.1 J1.1 P1.1 P2.1 S1.1 | length 94
  Top Layer w0.254: J1.1 -80.643,13.526 -80.643,14.483 -80.643,27.054 -70.765,36.932 P2.1
  Top Layer w1.67: S1.1@-108.814,-15.595 -103.48,-15.595 -103.314,-15.429 -103.314,-12.127 -100.947,-9.76 -100.947,-2.841 P1.1 ; F2.1 -89.256,2.439 -89.256,3.743 -89.31,3.797 P1.1 ; J1.1 -80.848,14.483 -81,14.635 -82.161,14.635 -84.333,16.807 -88.077,16.807 -94.336,10.548 -94.336,3.824 P1.1
CSA_FeedBack1: De1.4 U1_1.8 U1_1.9 | length 77.2
  Top Layer w0.254: U1_1.9 U1_1.9@18.212,5.775 ; U1_1.9@18.212,6.635 U1_1.9@18.212,5.775 ; 19.482,7.717 v1(19.482,8.733) ; 19.482,7.717 U1_1.8 19.482,5.775 19.323,5.935 18.372,5.935 U1_1.9@18.212,5.775 ; v1(33.198,8.733) 33.96,7.971 v1(33.96,-32.415)
  Bottom Layer w0.254: De1.4 19.712,-34.128 23.567,-34.128 25.281,-32.415 v1(33.96,-32.415) ; v1(19.482,8.733) v1(33.198,8.733)
CSA_FeedBack2: De1.5 U1_2.8 U1_2.9 | length 114.6
  Top Layer w0.254: U1_2.9 -56.718,7.463 v1(-55.448,8.733) U1_2.8 ; v1(-36.144,-25.811) v1(-36.144,8.733)
  Bottom Layer w0.254: v1(-55.448,8.733) v1(-36.144,8.733) ; v1(-36.144,-25.811) -1.933,-25.811 0.678,-28.422 14.006,-28.422 De1.5
CSA_Origin_1: MD1_1.7 U1_1.10 | length 16.8
  Top Layer w0.254: MD1_1.7 9.095,12.541 v1(9.162,12.473) ; U1_1.10 16.942,12.311 17.036,12.405 v1(17.036,12.473)
  Bottom Layer w0.254: v1(9.162,12.473) v1(17.036,12.473)
CSA_Origin_2: MD1_2.7 U1_2.10 | length 19.2
  Top Layer w0.254: v1(-68.402,8.987) -68.388,9 -68.388,14.49 MD1_2.7 ; U1_2.10 v1(-57.988,8.987)
  Bottom Layer w0.254: v1(-68.402,8.987) v1(-57.988,8.987)
CSB_FeedBack1: De1.8 U1_1.13 U1_1.14 | length 82.3
  Top Layer w0.254: U1_1.14 U1_1.14@11.862,5.775 ; v1(11.862,7.971) U1_1.14@11.862,5.775 ; U1_1.13 13.132,5.775 12.973,5.935 12.022,5.935 U1_1.14@11.862,5.775 ; De1.8 15.708,-35.204 21.97,-35.204 25.145,-32.029 28.251,-32.029 31.928,-28.351 v1(31.928,7.971)
  Bottom Layer w0.254: v1(11.862,7.971) v1(31.928,7.971)
CSB_FeedBack2: De1.9 U1_2.13 U1_2.14 | length 115.2
  Top Layer w0.254: v1(-64.084,7.593) -62.983,7.593 ; U1_2.14 -63.068,7.508 -62.983,7.593 ; U1_2.13 -61.798,7.209 -62.181,7.593 -62.983,7.593 ; v1(-38.091,4.345) -38.091,-27.097 -37.922,-27.266 v1(-37.922,-27.335)
  Bottom Layer w0.254: v1(-64.084,7.593) -64.081,7.59 -60.278,7.59 -57.033,4.345 v1(-38.091,4.345) ; v1(-37.922,-27.335) -1.846,-27.335 0.257,-29.438 9.942,-29.438 De1.9
CSB_Origin_1: MD1_1.8 U1_1.12 | length 16.8
  Top Layer w0.254: MD1_1.8 6.588,14.469 6.588,11.745 v1(6.622,11.711) ; U1_1.12 14.449,5.732 14.449,11.665 v1(14.496,11.711)
  Bottom Layer w0.254: v1(6.622,11.711) v1(14.496,11.711)
CSB_Origin_2: MD1_2.8 U1_2.12 | length 19.3
  Top Layer w0.254: v1(-70.95,8.23) -70.933,8.247 -70.933,14.486 MD1_2.8 ; v1(-60.53,8.228) -60.528,8.225 U1_2.12
  Bottom Layer w0.254: v1(-70.95,8.23) -70.948,8.228 v1(-60.53,8.228)
De10-Power: De1.1 De1.21 F3.2 | length 143.8
  Top Layer w0.41: v1(-18.364,-22.001) -18.364,-22.028 -18.279,-22.112 De1.21 ; v1(-6.087,-22.071) v1(-6.087,33.809) ; v1(-0.585,33.815) F3.2 ; v1(32.932,-24.045) 32.932,-24.072 32.969,-24.109 v1(32.969,-29.311)
  Bottom Layer w0.41: v1(-18.364,-22.001) -6.184,-22.001 -6.114,-22.071 v1(-6.087,-22.071) 13.223,-22.071 15.185,-24.033 v1@32.919,-24.033 ; v1(-6.087,33.809) -6.084,33.812 -0.588,33.812 v1(-0.585,33.815) ; De1.1 31.823,-30.457 v1(32.969,-29.311)
Drive_EN1: De1.20 MD1_1.6 | length 88.3
  Top Layer w0.254: v1(-15.739,-37.311) De1.20 ; v1(-0.619,-37.276) -0.617,-37.274 -0.617,-10.398 -0.676,-10.339 -0.676,16.147 -0.605,16.218 v1(-0.605,16.875) ; MD1_1.6 11.664,14.532 11.664,17.016 v1(11.693,17.045)
  Bottom Layer w0.254: v1(-15.739,-37.311) -15.704,-37.276 v1(-0.619,-37.276) ; v1(-0.605,16.875) 11.454,16.875 11.624,17.045 v1(11.693,17.045)
Drive_EN2: De1.42 MD1_2.6 | length 69.7
  Top Layer w0.254: v1(-65.862,9.749) -65.848,9.762 -65.848,14.49 MD1_2.6 ; v1(-44.94,9.679) -44.94,-31.723 De1.42@-43.87,-32.793 ; De1.42@-43.87,-32.793 -43.679,-32.983 De1.42 -43.87,-33.057 De1.42@-43.87,-32.793
  Bottom Layer w0.254: v1(-65.862,9.749) -65.827,9.714 -44.975,9.714 v1(-44.94,9.679)
IMU_SCL: De1.17 P5.3 | length 42.2
  Top Layer w0.254: De1.17 -12.984,-30.492 v1@-12.984,-4.545
  Bottom Layer w0.254: P5.3 -27.675,-2.783 -26.659,-2.783 -26.492,-2.951 -24.89,-2.951 -23.297,-4.545 v1(-12.936,-4.545)
IMU_SDA: De1.19 P5.4 | length 36.8
  Top Layer w0.254: De1.19 -15.735,-30.703 -15.735,-7.089 v1(-15.73,-7.085)
  Bottom Layer w0.254: P5.4 -27.675,-5.323 -26.659,-5.323 -26.492,-5.491 -17.324,-5.491 v1(-15.73,-7.085)
MA1_1: MD1_1.10 P3_1.1 U2_1.3 | length 50.6
  Top Layer w0.381: MD1_1.10@21.795,-26.137 21.91,-26.022 21.91,-20.664 U2_1.3 ; v1(24.308,-22.763) 24.308,-26.111 24.335,-26.137 MD1_1.10@24.335,-26.287 ; v1(39.04,-22.763) 39.04,-26.303 v1(39.065,-26.279) ; P3_1.1 53.772,-34.619 53.772,-29.113 v1(53.772,-26.319)
  Bottom Layer w0.381: v1(24.308,-22.763) v1(39.04,-22.763) ; v1(39.065,-26.279) 53.732,-26.279 v1(53.772,-26.319)
MA1_2: MD1_2.10 P3_2.1 U2_2.3 | length 53.1
  Top Layer w0.381: v1(-93.962,-32.246) -93.955,-32.252 P3_2.1 ; v1(-57.894,-32.231) -57.894,-28.506 -55.675,-26.287 -55.675,-26.137 -54.743,-26.137 -54.29,-25.684 -54.29,-20.537 U2_2.3 ; MD1_2.10@-53.135,-26.137 MD1_2.10@-52.377,-26.137
  Bottom Layer w0.381: v1@-93.947,-32.231 v1(-57.894,-32.231)
MA2_1: MD1_1.11 P3_1.6 U2_1.1 | length 65.7
  Top Layer w0.381: MD1_1.11@16.715,-26.137 16.83,-26.022 16.83,-20.934 U2_1.1 ; v1(19.228,-21.493) 19.204,-21.517 19.204,-26.086 MD1_1.11@19.255,-26.137 ; v1(57.836,-21.603) 66.446,-30.212 P3_1.6
  Bottom Layer w0.381: v1(19.228,-21.493) 41.565,-21.613 57.827,-21.613 v1(57.836,-21.603)
MA2_2: MD1_2.11 P3_2.6 U2_2.1 | length 45.5
  Top Layer w0.381: P3_2.6 -81.255,-38.333 -78.722,-40.867 -61.704,-40.867 -60.714,-39.877 -60.714,-32.542 -60.688,-32.515 -60.688,-26.204 MD1_2.11@-60.755,-26.137 ; U2_2.1 -58.985,-25.389 -58.237,-26.137 MD1_2.11@-58.215,-26.137
MA_DIR1: De1.12 MD1_1.2 | length 86.3
  Top Layer w0.254: v1(-3.547,-33.247) v1(-3.547,20.093) ; MD1_1.2 21.824,14.532 v1(21.824,20.064)
  Bottom Layer w0.254: De1.12 v1(-3.547,-33.247) ; v1(-3.547,20.093) -3.506,20.052 9.344,20.052 9.356,20.064 v1(21.824,20.064)
MA_DIR2: De1.32 MD1_2.2 | length 71.7
  Top Layer w0.254: v1(-55.675,12.598) MD1_2.2 ; v1(-32.342,12.548) -32.388,12.502 -32.388,-30.898 -31.17,-32.116 -31.17,-33.057 De1.32
  Bottom Layer w0.254: v1(-55.675,12.598) -55.65,12.573 -32.367,12.573 v1(-32.342,12.548)
MA_phaseA1: De1.24 P3_1.3 | length 92.3
  Top Layer w0.254: De1.24 -20.815,-33.252 -20.815,-39.846 v1(-20.81,-39.851) ; v1(58.692,-40.443) 58.741,-40.394 58.741,-34.73 P3_1.3
  Bottom Layer w0.254: v1(-20.81,-39.851) -20.071,-40.589 57.285,-40.589 57.305,-40.57 58.565,-40.57 v1(58.692,-40.443)
MA_phaseA2: De1.44 P3_2.3 | length 57
  Top Layer w0.254: v1(-88.882,-41.121) -88.879,-41.117 -88.879,-34.649 P3_2.3 ; De1.44 -46.215,-33.252 -46.215,-41.116 v1(-46.21,-41.121)
  Bottom Layer w0.254: v1(-88.882,-41.121) v1(-46.21,-41.121)
MA_phaseB1: De1.26 P3_1.4 | length 98.6
  Top Layer w0.254: De1.26 -23.359,-39.841 -23.35,-39.851 -23.35,-39.811 v1(-23.299,-39.76) ; P3_1.4 61.366,-41 61.486,-41.121 61.47,-41.121 v1(61.427,-41.078)
  Bottom Layer w0.254: v1(-23.299,-39.76) -21.962,-41.097 58.343,-41.097 58.362,-41.078 v1(61.427,-41.078)
MA_phaseB2: De1.46 P3_2.4 | length 50.7
  Top Layer w0.254: v1(-86.342,-40.359) -86.335,-40.352 P3_2.4 ; De1.46 -48.755,-33.252 -48.755,-40.354 v1(-48.75,-40.359)
  Bottom Layer w0.254: v1(-86.342,-40.359) -86.32,-40.359 -86.066,-40.613 -48.899,-40.613 -48.899,-40.576 -48.75,-40.427 v1(-48.75,-40.359)
MA_PWM1: De1.14 MD1_1.3 | length 87.9
  Top Layer w0.254: v1(-8.119,-34.771) De1.14 ; v1(-2.785,-34.771) v1(-2.785,19.331) ; MD1_1.3 19.284,14.532 19.284,19.302 v1(19.313,19.331)
  Bottom Layer w0.254: v1(-8.119,-34.771) v1(-2.785,-34.771) ; v1(-2.785,19.331) v1(19.313,19.331)
MA_PWM2: De1.34 MD1_2.3 | length 71.9
  Top Layer w0.254: MD1_2.3 -58.215,11.865 v1(-58.187,11.837) ; v1(-34.628,11.717) -34.628,11.649 -34.832,11.445 -34.832,10.939 -34.882,10.888 -34.882,-31.833 -33.519,-33.196 De1.34
  Bottom Layer w0.254: v1(-58.187,11.837) -34.832,11.837 -34.83,11.835 -34.814,11.835 -34.697,11.717 v1(-34.628,11.717)
MA_V1: De1.2 R8_1.2 U1_1.7 | length 64.5
  Top Layer w0.254: U1_1.7 19.482,-0.349 19.642,-0.509 20.047,-0.509 21.768,-2.23 21.768,-3.246 21.318,-3.696 R8_1.2 v1(20.752,-7.979) ; v1(35.992,-31.653) 35.984,-31.644 35.984,-24.965 35.969,-24.95 35.969,-24.644 35.981,-24.632 ccw(c35.73,-24.594) 35.984,-24.594 35.984,-14.635 35.992,-14.626 v1(35.992,-8.031)
  Bottom Layer w0.254: v1(20.752,-7.979) 35.941,-7.979 v1(35.992,-8.031) ; De1.2 23.98,-32.997 25.324,-31.653 v1(35.992,-31.653)
MA_V2: De1.3 R8_2.2 U1_2.7 | length 102
  Top Layer w0.254: U1_2.7 -55.448,-1.216 -54.283,-2.38 -54.283,-3.246 -54.603,-3.565 -54.791,-3.565 R8_2.2 -54.899,-3.754 -53.339,-3.754 v1(-53.33,-3.763) ; v1(-33.35,-25.049) -33.35,-14.487 -33.256,-14.393 v1(-33.256,-3.783)
  Bottom Layer w0.254: v1(-53.33,-3.763) -52.833,-3.763 -52.814,-3.783 v1(-33.256,-3.783) ; v1(-33.35,-25.049) -1.976,-25.049 0.889,-27.914 16.038,-27.914 De1.3
MB1_1: MD1_1.12 P4_1.1 U3_1.3 | length 50.4
  Top Layer w0.381: MD1_1.12@11.635,-26.137 11.75,-26.022 11.75,-20.664 U3_1.3 ; v1(14.148,-20.223) 14.124,-20.247 14.124,-26.086 MD1_1.12@14.175,-26.137 ; P4_1.1 36.156,-33.82 36.156,-33.267 37.516,-31.907 v1(37.516,-20.223)
  Bottom Layer w0.381: v1(14.148,-20.223) v1(37.516,-20.223) ; P4_1.1 P4_1.1@35.382,-34.594
MB1_2: MD1_2.12 P4_2.1 U3_2.3 | length 59.4
  Top Layer w0.381: P4_2.1 -112.37,-33.187 v1(-108.407,-29.223) ; MD1_2.12@-65.835,-26.137 -65.744,-26.229 -65.744,-29.158 v1(-65.768,-29.183) ; U3_2.3 -64.565,-25.379 -63.807,-26.137 MD1_2.12@-63.295,-26.137
  Bottom Layer w0.381: v1(-108.407,-29.223) -108.398,-29.231 -100.033,-29.231 -100.003,-29.261 -70.395,-29.261 -70.316,-29.183 v1@-65.802,-29.183
MB2_1: MD1_1.13 P4_1.6 U3_1.1 | length 67.9
  Top Layer w0.381: MD1_1.13@6.555,-26.137 7.105,-25.587 7.105,-20.599 U3_1.1 ; v1(9.068,-18.953) 9.044,-18.977 9.044,-26.086 MD1_1.13@9.095,-26.137 ; P4_1.6 48.16,-34.516 48.16,-18.977 v1(48.184,-18.953)
  Bottom Layer w0.381: v1(9.068,-18.953) v1(48.184,-18.953)
MB2_2: MD1_2.13 P4_2.6 U3_2.1 | length 43.4
  Top Layer w0.381: P4_2.6 -99.574,-34.549 -99.574,-28.191 v1(-99.55,-28.167) ; MD1_2.13@-70.915,-26.137 -70.824,-26.229 -70.824,-28.142 v1(-70.848,-28.167) ; U3_2.1 -69.145,-25.389 -68.397,-26.137 MD1_2.13@-68.375,-26.137
  Bottom Layer w0.381: v1(-99.55,-28.167) v1(-70.848,-28.167)
MB_DIR1: De1.16 MD1_1.4 | length 87.8
  Top Layer w0.254: v1(-10.659,-35.533) De1.16 ; v1(-2.014,-35.533) -2.014,18.346 -1.854,18.506 v1(-1.854,18.575) ; MD1_1.4 16.744,14.532 16.744,18.54 v1(16.773,18.569)
  Bottom Layer w0.254: v1(-10.659,-35.533) v1@-2.023,-35.533 ; v1@-2.023,-35.533 v1(-2.014,-35.533) ; v1(-1.854,18.575) -1.85,18.572 16.77,18.572 v1(16.773,18.569)
MB_DIR2: De1.36 MD1_2.4 | length 74.4
  Top Layer w0.254: v1(-60.755,11.201) MD1_2.4 ; De1.36 -36.059,-32.91 -37.422,-31.547 -37.422,-29.87 -35.467,-27.914 v1(-35.467,11.202)
  Bottom Layer w0.254: v1(-60.755,11.201) v1(-35.467,11.202)
MB_phaseA1: De1.28 P4_1.3 | length 78.3
  Top Layer w0.254: De1.28 -25.899,-39.587 -24.897,-40.589 39.158,-40.589 40.411,-39.336 P4_1.3
MB_phaseA2: De1.48 P4_2.3 | length 61.5
  Top Layer w0.254: P4_2.3 -107.29,-30.573 -107.248,-30.531 v1(-107.17,-30.531)
  Bottom Layer w0.254: v1(-107.17,-30.531) -106.837,-30.199 -100.434,-30.199 -100.404,-30.229 -56.858,-30.229 -55.109,-31.977 -52.569,-31.977 De1.48
MB_phaseB1: De1.30 P4_1.4 | length 83.5
  Top Layer w0.254: De1.30 -28.439,-39.079 -26.421,-41.097 41.19,-41.097 42.951,-39.336 P4_1.4
MB_phaseB2: De1.50 P4_2.4 | length 55.6
  Top Layer w0.254: v1(-104.884,-31.215) -104.75,-31.348 P4_2.4
  Bottom Layer w0.254: v1(-104.884,-31.215) -104.862,-31.215 -104.608,-30.961 -57.64,-30.961 -55.353,-33.247 De1.50
MB_PWM1: De1.18 MD1_1.5 | length 88.1
  Top Layer w0.254: v1(-13.199,-36.295) De1.18 ; v1(-1.3,-36.434) -1.252,-36.385 v1(-1.252,17.807) ; MD1_1.5 14.204,14.532 14.204,17.778 v1(14.233,17.807)
  Bottom Layer w0.254: v1(-13.199,-36.295) -1.507,-36.295 -1.369,-36.434 v1(-1.3,-36.434) ; v1(-1.252,17.807) v1@14.233,17.807
MB_PWM2: De1.38 MD1_2.5 | length 71.9
  Top Layer w0.254: v1(-63.295,10.439) MD1_2.5 ; v1(-39.673,10.439) -39.673,10.37 -39.73,10.313 -39.73,-32.116 De1.38
  Bottom Layer w0.254: v1(-63.295,10.439) v1(-39.673,10.439)
MB_V1: De1.6 R4_1.2 U1_1.1 | length 69.1
  Top Layer w0.254: v1(10.592,-9.088) R4_1.2 10.502,-3.606 9.936,-3.606 9.576,-3.246 9.576,-2.723 10.704,-1.596 10.982,-1.596 11.862,-0.715 U1_1.1 ; De1.6 17.74,-34.696 21.76,-34.696 24.935,-31.521 27.743,-31.521 31.042,-28.222 31.042,-9.245 30.91,-9.113 v1(30.91,-9.044)
  Bottom Layer w0.254: v1(10.592,-9.088) 10.636,-9.044 v1(30.91,-9.044)
MB_V2: De1.7 R4_2.2 U1_2.1 | length 106.3
  Top Layer w0.254: R4_2.2@-63.724,-3.713 -63.724,-3.565 -63.912,-3.565 -64.232,-3.246 -64.232,-2.38 -63.068,-1.216 U1_2.1 ; v1(-63.576,-9.047) R4_2.2 ; v1(-36.906,-26.573) v1(-36.906,-9.047)
  Bottom Layer w0.254: v1(-63.576,-9.047) v1(-36.906,-9.047) ; v1(-36.906,-26.573) -1.889,-26.573 0.468,-28.93 11.974,-28.93 De1.7
NetC1_1: C1.1 C2.1 D3.2 L1.1 | length 53.6
  Top Layer w0.31: D3.2 -81.006,2.749 -79.936,3.819 -79.936,4.646 -78.486,6.096 -78.486,27.686 -73.761,32.411 L1.1 -60.808,28.842 C1.1@-61.303,28.347 ; C1.1 C1.1@-61.303,28.347 ; C2.1 C1.1@-61.303,28.347
NetC3_1: C3.1 C4.1 L1.2 T1.1 | length 28.2
  Top Layer w0.31: L1.2 C4.1 -55.732,32.389 -55.732,28.842 -55.237,28.347 C3.1 -54.911,28.351 -46.588,28.351 T1.1
NetD1_1: D1.1 R1.1 | length 2.9
  Top Layer w0.254: R1.1@-113.748,-9.957 -113.748,-10.216 R1.1 -113.402,-10.216 -113.402,-9.683 -112.825,-9.106 D1.1
NetD2_1: D2.1 F1.2 R1.2 | length 40.3
  Top Layer w0.254: R1.2 -112.075,-15.636 -110.069,-17.642 -95.393,-17.642 F1.2
  Top Layer w2: F1.2 -94.844,-16 -93.939,-15.095 -89.518,-15.095 -87.133,-12.71 -87.133,-12.031 -83.134,-8.031 D2.1
NetD3_1: D3.1 F2.2 | length 8.6
  Top Layer w0.31: F2.2 -81.86,-4.953 -81.382,-4.475 -81.382,-2.978 D3.1
NetD4_1: D4.1 R10.1 | length 1.7
  Top Layer w0.254: R10.1 9.175,46.381 D4.1
NetF1_1: F1.1 S1.2 | length 15.6
  Top Layer w1.67: S1.2@-108.814,-25.755 -95.914,-25.755 -94.844,-24.685 F1.1
NetF4_2: F4.2 P7.1 | length 23.9
  Top Layer w0.41: F4.2 -0.796,44.392 13.538,44.392 P7.1
OPA_A+_1: R2_1.2 R3_1.1 U1_1.3 | length 7
  Top Layer w0.254: U1_1.3 U1_1.3@14.402,-0.677 ; U1_1.3@14.402,-0.677 R2_1.2 14.385,-2.796 R3_1.1 13.132,-1.947 U1_1.3@14.402,-0.677
OPA_A+_2: R2_2.2 R3_2.1 U1_2.3 | length 4.1
  Top Layer w0.254: R3_2.1 R2_2.2 U1_2.3
OPA_A-_1: R4_1.1 R5_1.2 U1_1.2 | length 5
  Top Layer w0.254: R4_1.1 11.17,-2.796 11.282,-2.684 R5_1.2@11.862,-2.684 ; R5_1.2 R5_1.2@11.862,-2.684 ; U1_1.2 13.132,-1.214 12.624,-1.722 12.37,-1.722 11.862,-2.23 R5_1.2@11.862,-2.684
OPA_A-_2: R4_2.1 R5_2.2 U1_2.2 | length 4.4
  Top Layer w0.254: R4_2.1 R5_2.2 -62.568,-2.804 -62.568,-2.133 -62.111,-1.676 -62.103,-1.676 -61.798,-1.371 U1_2.2
OPA_B+_1: R6_1.2 R7_1.1 U1_1.5 | length 4.2
  Top Layer w0.254: U1_1.5 16.942,-2.692 16.951,-2.701 17.523,-2.701 17.618,-2.796 R6_1.2
OPA_B+_2: R6_2.2 R7_2.1 U1_2.5 | length 4
  Top Layer w0.254: R7_2.1@-57.996,-2.701 -57.988,-2.692 U1_2.5 ; R7_2.1@-57.988,-2.701 -57.083,-2.701 R6_2.2
OPA_B-_1: R8_1.1 R9_1.2 U1_1.6 | length 4.8
  Top Layer w0.254: U1_1.6 18.212,-0.715 19.482,-1.985 19.482,-2.684 20.64,-2.684 R8_1.1
OPA_B-_2: R8_2.1 R9_2.2 U1_2.6 | length 4.3
  Top Layer w0.254: U1_2.6 -56.718,-1.38 -55.964,-2.133 R9_2.2@-55.964,-2.701 ; R9_2.2 R8_2.1
UART_RX: De1.13 P6.1 | length 94.2
  Top Layer w0.254: De1.13 -8.119,-24.525 -7.95,-24.356 v1(-7.95,-24.287) ; v1(-0.041,10.228) -0.011,10.198 -0.011,-24.327 v1(0.018,-24.357) ; v1(26.078,10.262) 26.078,18.077 26.238,18.237 v1(26.238,18.306)
  Bottom Layer w0.254: v1(-7.95,-24.287) -7.915,-24.322 -0.017,-24.322 v1(0.018,-24.357) ; v1(-0.041,10.228) 26.043,10.228 v1(26.078,10.262) ; v1(26.238,18.306) 36.83,18.306 P6.1
UART_TX: De1.15 P6.2 | length 93.9
  Top Layer w0.254: De1.15 -10.625,-30.674 -10.625,-23.384 v1(-10.592,-23.35) ; v1(0.686,-23.335) v1(0.686,9.431) ; v1(27.094,9.5) 27.094,15.836 v1(27.102,15.845)
  Bottom Layer w0.254: v1(-10.592,-23.35) -10.584,-23.343 0.679,-23.343 v1(0.686,-23.335) ; v1(0.686,9.431) 0.72,9.398 26.818,9.398 ; v1(27.102,15.845) 27.151,15.796 36.85,15.796 P6.2
VSA_Origin_1: R6_1.1 U2_1.4 | length 10.9
  Top Layer w0.254: R6_1.1 18.212,-8.623 19.505,-9.916 U2_1.4
VSA_Origin_2: R6_2.1 U2_2.4 | length 10.4
  Top Layer w0.254: R6_2.1 -56.972,-13.696 U2_2.4
VSB_Origin_1: R2_1.1 U3_1.4 | length 12.5
  Top Layer w0.254: U3_1.4 9.345,-13.674 14.399,-8.62 14.399,-3.717 R2_1.1
VSB_Origin_2: R2_2.1 U3_2.4 | length 13.5
  Top Layer w0.254: U3_2.4 -66.855,-13.547 -64.207,-10.899 -63.075,-10.899 -60.531,-8.356 -60.531,-3.717 R2_2.1
pads on no net: De1.11 De1.23 De1.25 De1.27 De1.29 De1.31 De1.33 De1.35 De1.37 De1.39 De1.41 De1.43 De1.45 De1.47 De1.49 P5.5 P5.6 P5.7 P5.8 P5.9 P5.10 T1.4 T1.6 T2.4
copper on no net:
  other v3: 41.539,-16.103 41.539,-7.213 -34.374,40.046 -25.484,40.046

## Polygon pours and split planes (outlines as drawn)
A_GND on Bottom Layer "A_GND_L02_P001" (solid, remove dead copper, pour order 1): -24.003,12.573 -24.003,0 0,0 0,-27.826 5.588,-27.826 5.588,-23.495 0,-23.622 0,0 6.274,0 6.274,3.67 -24.003,3.67 -24.003,12.573 -20.038,12.573 -20.038,22.098 -44.069,22.098 -44.069,47.481 14.774,47.671 68.555,-6.109 68.555,-41.603 -114.809,-41.603 -114.809,-29.337 -72.39,-29.337 -72.39,12.573
A_GND on Bottom Layer "A_GND_L02_P000" (solid, pour order 0): -61.441,47.919 -115.138,-6.761 -115.138,-28.715 -73.654,-28.715 -73.654,16.405 -51.054,16.405 -51.054,13.195 -20.904,13.195 -20.904,21.463 -44.577,21.463 -44.577,48.287

## Keep-outs
Keep-Out Layer:
  the board outline again, w1.2

## Other copper
Bottom Layer:
  pour cut-out: -75.474,29.378 -72.305,29.378 -70.064,27.137 -70.064,23.968 -72.305,21.728 -75.474,21.728 -77.714,23.968 -77.714,27.137
  pour cut-out: 22.377,-29.057 22.391,-34.377 22.377,-34.391 9.677,-34.391 9.677,-29.057
  pour cut-out: -4.293,-29.565 -4.293,-34.391 -55.093,-34.391 -55.093,-29.565

## Silkscreen, mask and mechanical layers (free items; w line width, h text height)
Mechanical 1:
  circle w0.013: c-58.054,40.402 r1.75
  circle w0.013: c-107.487,-9.031 r1.75
  circle w0.013: c61.288,-9.031 r1.75
  circle w0.013: c11.855,40.402 r1.75
  lines w0.013: 69.287,-7.789 69.255,-42.48 -115.487,-42.48 -115.487,-7.789 cw(c-110.487,-7.789) -114.023,-4.253 -62.832,46.937 cw(c-59.297,43.402) -59.297,48.402 13.098,48.402 cw(c13.098,43.402) 16.633,46.937 67.824,-4.253 cw(c64.288,-7.789) 69.288,-7.789

## Text inside footprints (layer, text, board x,y; h text height)
C6: Top Overlay "+" at -7.204,20.559 h1.5 r90
C7: Top Overlay "+" at 13.624,32.053 h1.5 r90
C11: Top Overlay "+" at 40.134,8.932 h3 r270
C12: Top Overlay "+" at -16.697,45.588 h3 r180
De1: Top Overlay "1" at -3.674,-31.342 h1.27; Top Overlay "2" at -3.674,-33.882 h1.27; Top Overlay "40" at -58.284,-33.882 h1.27; Top Overlay "39" at -58.284,-31.342 h1.27; Top Overlay "10" at 7.151,-33.632 h1.27; Top Overlay "9" at 7.786,-31.092 h1.27; Top Overlay "1" at 22.911,-30.874 h1.27; Top Overlay "2" at 22.911,-33.414 h1.27
P1: Top Overlay "+" at -91.854,6.718 h1.27 r270
P2: Top Overlay "+" at -66.481,41.123 h1.27 r270
P7: Top Overlay "+" at 19.643,41.885 h1.27 r270